# Altium PCB LedBlinker Rats Nest.PcbDoc
Units mil, origin at the board's own origin, x right, y up, seen from the top; angles counter-clockwise.
Board outline 1050 x 1050 mil, 2 copper layers (Top Layer, Bottom Layer), stack 64.8 mil thick; 27 components, 31 nets, 96 pads, 24 vias.
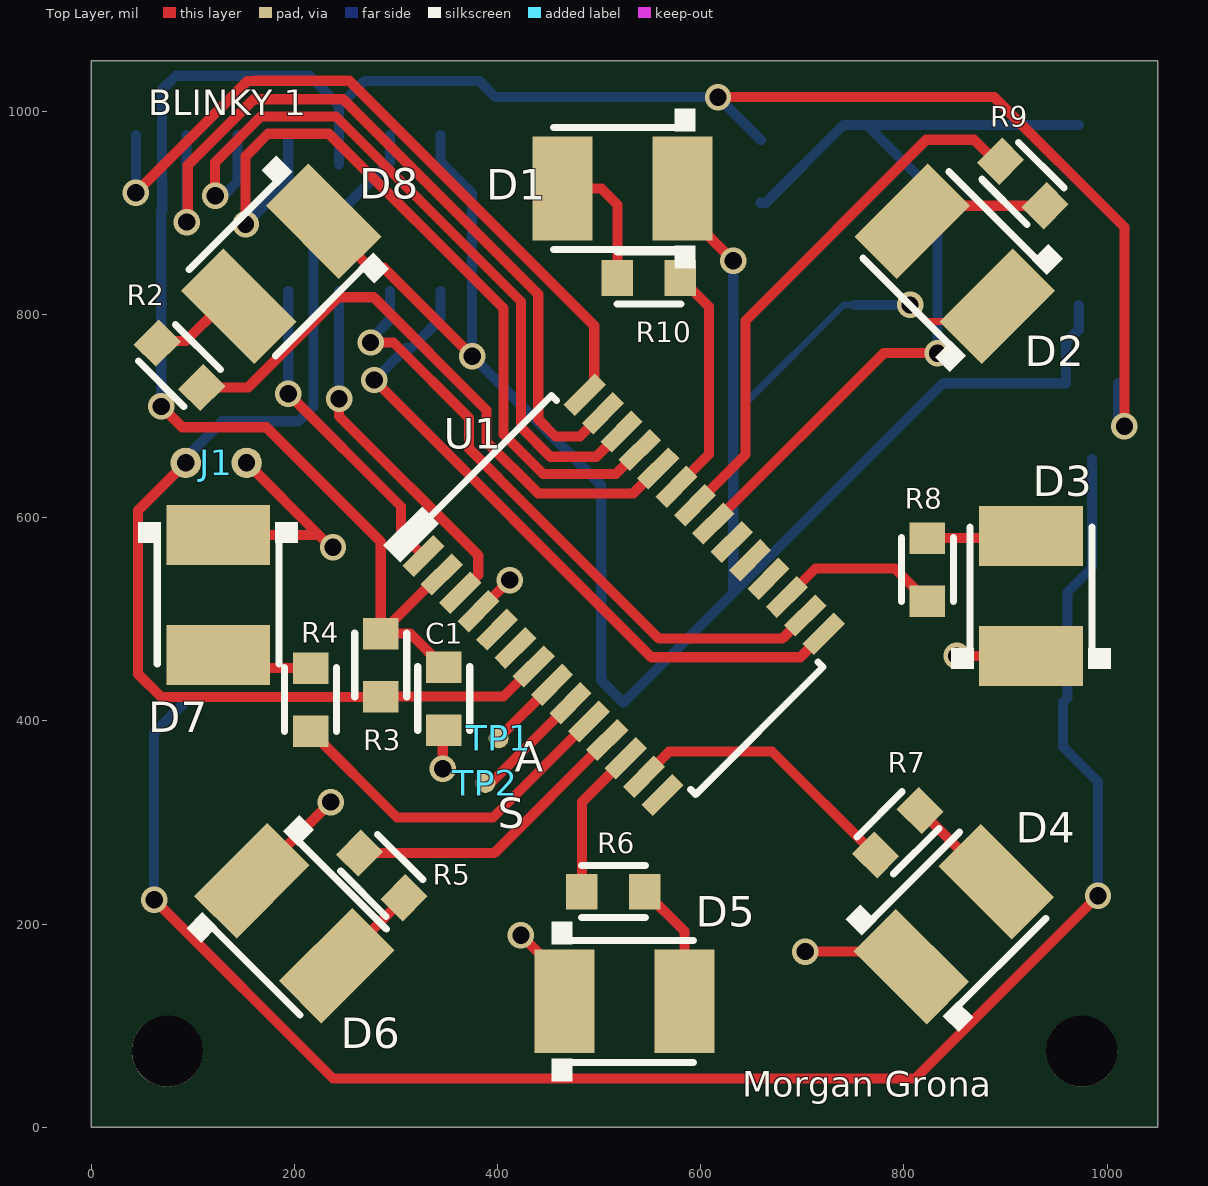
[diagram p0: Top Layer view]
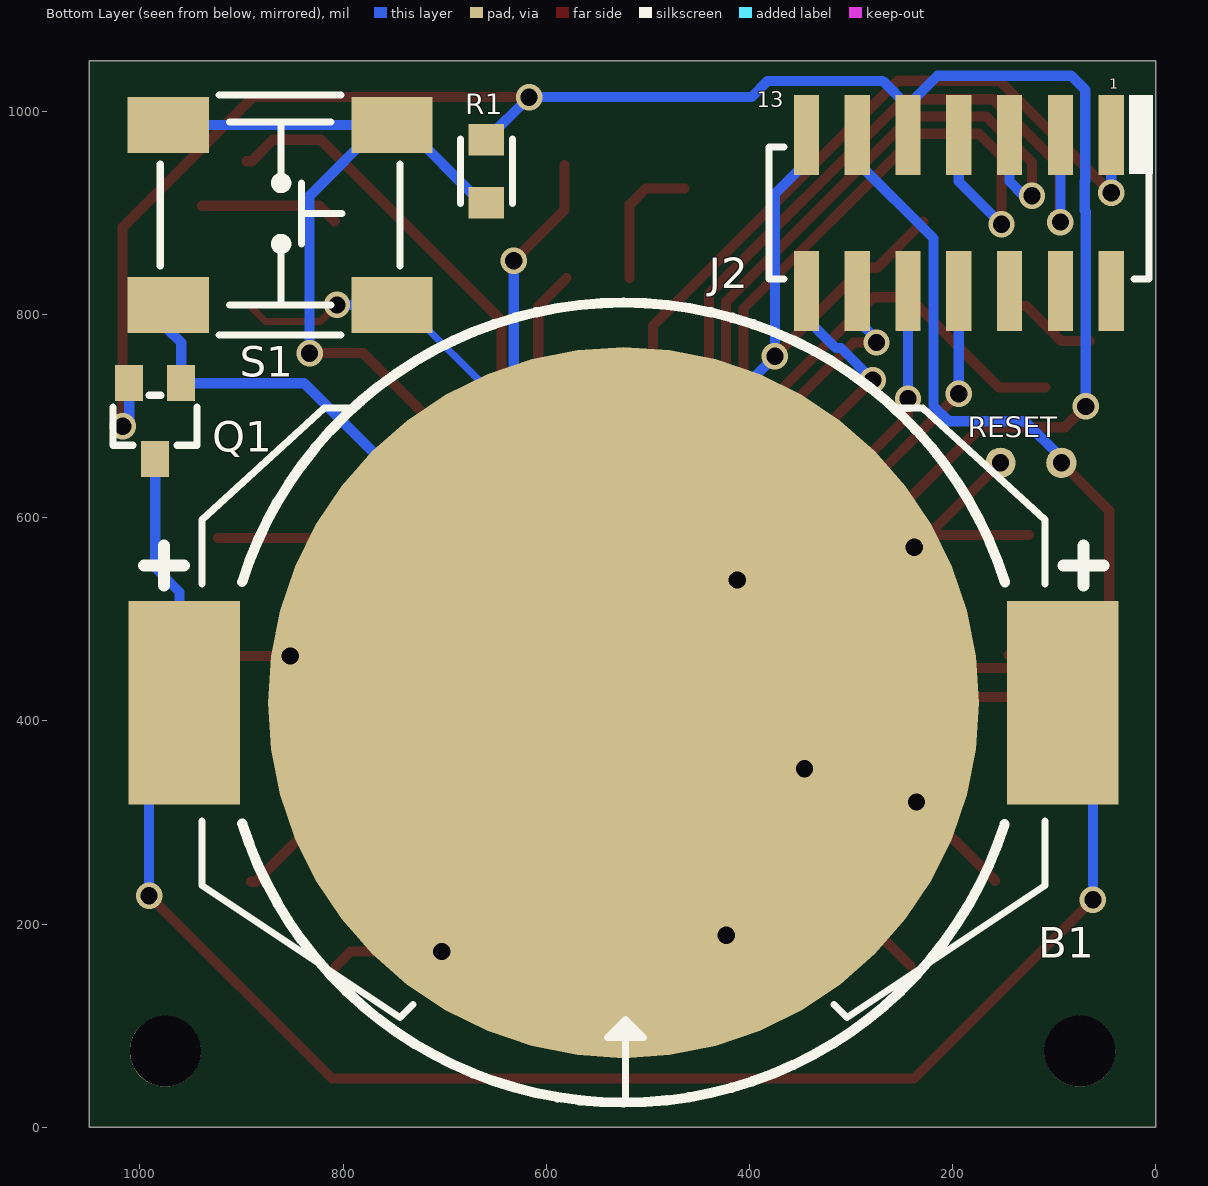
[diagram p1: Bottom Layer view, seen from below]

## Layer stack, top to bottom
Top Solder: solder mask 0.4, Solder Resist, Dk 3.5
Top Layer: signal copper 1.4
Dielectric1: core 62, FR-4, Dk 4.8
Bottom Layer: signal copper 1.4
Bottom Solder: solder mask 0.4, Solder Resist, Dk 3.5

## Board outline
0,0 0,1050 1050,1050 1050,0

## Design rules (kind name [scope] priority, off if disabled: settings)
Clearance ClearancePolygon [All vs InPoly] p1: gap=20 ignorepadtopadclearanceinfootprint=FALSE except(0: Arc-Hole Track-Hole SMDPad-Hole THPad-Hole Via-Hole Fill-Hole Poly-Hole Region-Hole Text-Hole)
Clearance [All] p2: gap=7 ignorepadtopadclearanceinfootprint=FALSE except(0: Arc-Hole Track-Hole SMDPad-Hole THPad-Hole Via-Hole Fill-Hole Poly-Hole Region-Hole Text-Hole)
HoleSize [All] p1: absolutevalues=TRUE maxlimit=250 minlimit=17 maxpercent=80.000 minpercent=20.000
MinimumSolderMaskSliver [All] p1 off: minsoldermaskwidth=10
PolygonConnect PolygonConnectVia [All vs IsVia] p1: connectstyle=Direct reliefconductorwidth=10 reliefentries=4 polygonreliefangle="90 Angle" airgapwidth=10
PolygonConnect [All] p2: connectstyle=Relief reliefconductorwidth=10 reliefentries=4 polygonreliefangle="90 Angle" airgapwidth=10
RoutingVias [All] p1: holewidth=17 width=26 viastyle="Through Hole" minholewidth=17 minwidth=26 maxholewidth=200 maxwidth=250
SilkToSilkClearance [All] p1 off: silktosilkclearance=10
SilkToSolderMaskClearance SilkscreenOverComponentPads [IsPad] p1 off: minsilkscreentomaskgap=7 clearancetoexposedcopper=TRUE
SolderMaskExpansion [All] p1: expansion=0
Width [All] p1: maxlimit=250 minlimit=7 preferedwidth=10
26 further rules are at their usual default settings.

## Components (designator, comment, footprint, x,y, rotation, side; value= is the part's Value field where it differs from the comment)
B1 "CR2032" "CONN BATTERY HOLDER CR2032" 524,418 r180 bottom locked
C1 "1uF" 0603 347,422 r270 top
D1 "GRN" "PLCC-2 AK" 523,924 r90 top
D2 "RED" "PLCC-2 AK" 850,850 r45 top
D3 "GRN" "PLCC-2 AK" 925,523 r0 top
D4 "RED" "PLCC-2 AK" 849,200 r315 top
D5 "GRN" "PLCC-2 AK" 525,124 r270 top
D6 "RED" "PLCC-2 AK" 200,201 r225 top
D7 "GRN" "PLCC-2 AK" 125,524 r180 top
D8 "RED" "PLCC-2 AK" 187,850 r135 top
J1 "RESET PADS" "JUMPER POINTS" 123,654 r180 top
J2 "JTAG/SERIAL" "CONN 14POS 7X2 SMT FEMALE SMALL" 194,900 r270 bottom locked
Q1 "DMG1013" SC-70-3 985,695 r180 bottom locked
R1 "100k" 0603 659,941 r90 bottom
R2 "390R" 0603 87,750 r135 top
R3 "100k" 0603 285,455 r90 top
R4 "390R" 0603 216,421 r90 top
R5 "390R" 0603 286,248 r315 top
R6 "390R" 0603 514,232 r0 top
R7 "390R" 0603 794,290 r45 top
R8 "390R" 0603 823,549 r90 top
R9 "390R" 0603 917,929 r315 top
R10 "390R" 0603 549,836 r180 top
S1 "TL3301" "SWITCH TACT SMT TL3301 J LEAD" 862,898 r180 bottom locked
TP1 "A" "TEST POINT SMT TINY" 401,382.9 r90 top
TP2 "S" "TEST POINT SMT TINY" 388,339 r90 top
U1 "MSP430F2122" TSSOP28 524,524 r315 top

## Footprints (in the part's own frame and the unit in brackets; to place one, negate y for a bottom-side part, rotate by r counter-clockwise, add the part's x,y. Pads: shape width x height; smd on the part's side, far side on the other; paste and mask are expansions set on the pad)
0603 [mil]
  rect 31x35 smd: 1(-31,0) 2(31,0)
  silkscreen extent -31,-26 31,26
"CONN 14POS 7X2 SMT FEMALE SMALL" [mm]
  rect 2x0.63 smd: 1(-1.95,3.81) 2(1.95,3.81) 3(-1.95,2.54) 4(1.95,2.54) 5(-1.95,1.27) 6(1.95,1.27) 7(-1.95,0) 8(1.95,0) 9(-1.95,-1.27) 10(1.95,-1.27) 11(-1.95,-2.54) 12(1.95,-2.54) 13(-1.95,-3.81) 14(1.95,-3.81)
  silkscreen extent -2.95,-4.75 1.65,4.85
"CONN BATTERY HOLDER CR2032" [mm]
  rect 2.79x5.08 smd: +(-10.985,0) +(10.985,0)
  round 17.78 smd: -(0,0)
  silkscreen extent -11.99,-10 12,10
"JUMPER POINTS" [mil]
  round 30 hole 17: 1(-30,0) 2(30,0)
"PLCC-2 AK" [mil]
  rect 102x59 smd: A(0,59) K(0,-59)
  silkscreen extent -79,-72 79,68
SC-70-3 [mm]
  rect 0.7x0.9 smd paste+0 mask+0: 1(0.65,0.95) 2(-0.65,0.95) 3(0,-0.95)
  silkscreen extent -1.05,-0.6 1.05,0.65
"SWITCH TACT SMT TL3301 J LEAD" [mil]
  rect 80x55 smd: 1(-110,-88.5) 2(110,-88.5) 3(-110,88.5) 4(110,88.5)
  silkscreen extent -118,-118 118,118
"TEST POINT SMT TINY" [mm]
  round 0.5 smd paste-100: 1(0,0)
TSSOP28 [mm]
  rect 0.4x1.1 smd: 1(-4.225,-2.85) 2(-3.575,-2.85) 3(-2.925,-2.85) 4(-2.275,-2.85) 5(-1.625,-2.85) 6(-0.975,-2.85) 7(-0.325,-2.85) 8(0.325,-2.85) 9(0.975,-2.85) 10(1.625,-2.85) 11(2.275,-2.85) 12(2.925,-2.85) 13(3.575,-2.85) 14(4.225,-2.85) 15(4.225,2.85) 16(3.575,2.85) 17(2.925,2.85) 18(2.275,2.85) 19(1.625,2.85) 20(0.975,2.85) 21(0.325,2.85) 22(-0.325,2.85) 23(-0.975,2.85) 24(-1.625,2.85) 25(-2.275,2.85) 26(-2.925,2.85) 27(-3.575,2.85) 28(-4.225,2.85)
  silkscreen extent -5.13,-3.37 4.8,2.25

## Part data
B1: library part "CONN BATTERY HOLDER CR2032", "3V Coincell Battery"
C1: library part "CAPACITOR NON-POLARIZED"
D1 D2 D3 D4 D5 D6 D7 D8: library part "LED AK"
J1: library part "CONN SIP 2"
J2: library part "CONN JTAG/SERIAL DEBUG 14POS FEMALE"
Q1: library part "TRANS PMOS 1G 2S 3D"
R1 R2 R3 R4 R5 R6 R7 R8 R9 R10: library part RESISTOR
S1: library part "SWITCH SPST TL3301 JLEAD", "SPST TACT SWITCH"
TP1 TP2: library part "TEST POINT SMT"
U1: library part "MCU MSP430F2122 TSSOP28 LED BLINKER"

## Free pads (board coordinates)
  round 70 hole 70 unplated paste-100 mask-100: ""(75,75) ""(975,75)

## Via types
v1: diameter 26, hole 17, Top Layer to Bottom Layer, 24 vias

## Nets (pads, with @x,y where several pads share a name; then routed paths per layer and width w, separated by ;. In a path a pad name is that pad's centre, name@x,y a point inside that pad or via, vN(x,y) a via of type N, cw(c..) or ccw(c..) an arc to the next point about the centre after c; other vN are vias at no path point)
GND: B1.- C1.2 D1.K D2.K D3.K D4.K D5.K D6.K D7.K D8.K J1.1 J2.13 Q1.1 S1.1 S1.2 U1.4 | length 2912.7
  Top Layer w7: v1(806,809.5) 822.5,793 876.44,793 D2.K
  Top Layer w10: D7.K 224,583 ; J1.1 224,583 ; D6.K v1(235.7,320.14) v1@236,320.14 ; D8.K 274.44,846 288,846 v1(375,759) ; v1@236,571 224,583 ; v1@237,572 v1(238,571) ; v1(346,353) 346,390 C1.2 ; U1.4 v1(412,538.67) ; v1(423,189) 466,146 D5.K ; D1.K@582,947 D1.K 582,903 v1(632,853) ; v1(702.86,173) 792.56,173 D4.K ; v1(852,464) D3.K
  Bottom Layer w7: B1.-@643.75,701.25 643.75,712.75 740.5,809.5 S1.2
  Bottom Layer w10: J2.13 344,950 375,919 v1(375,759) 502,632 502,440 B1.- B1.-@632,526 ; v1(632,853) B1.-@632,526 ; S1.2 v1(806,809.5) ; S1.1 972,785 959.41,772.41 Q1.1 838.4,732.4 B1.-@632,526
LED1: R10.1 U1.23 | length 230.3
  Top Layer w10: U1.23 608,662.29 608,808 R10.1
LED2: R9.1 U1.22 | length 535.7
  Top Layer w10: U1.22 644,662.1 644,794 822,972 869,972 890.08,950.92 R9.1
LED3: R8.1 U1.17 | length 163.1
  Top Layer w10: U1.17 712.86,550 791,550 R8.1
LED4: R7.1 U1.13 | length 280.4
  Top Layer w10: U1.13 569.05,370 670.16,370 R7.1
LED5: R6.1 U1.12 | length 149.1
  Top Layer w10: R6.1 483,320.14 U1.12
LED6: R5.1 U1.11 | length 290.1
  Top Layer w10: R5.1 396.59,269.92 U1.11
LED7: R4.1 U1.10 | length 348.2
  Top Layer w10: R4.1 301,305 395.48,305 U1.10
LED8: R2.1 U1.24 | length 594.3
  Top Layer w10: R2.1 154.18,728.08 243.1,817 278,817 389,706 389,674.92 437.92,626 438,626 440,624 533.52,624 U1.24
NetD1_A: D1.A R10.2 | length 132.6
  Top Layer w10: D1.A 502,924 518,908 R10.2
NetD2_A: D2.A R9.2 | length 137
  Top Layer w10: D2.A 823.64,907.08 R9.2
NetD3_A: D3.A R8.2 | length 100
  Top Layer w10: R8.2 D3.A@923,580
NetD4_A: D4.A R7.2 | length 103.9
  Top Layer w10: R7.2 886.12,241.72 D4.A
NetD5_A: D5.A R6.2 | length 131.2
  Top Layer w10: R6.2 584,193 D5.A D5.A@579,129
NetD6_A: D6.A R5.2 | length 94.2
  Top Layer w10: D6.A 307.92,225.48 R5.2
NetD7_A: D7.A R4.2 | length 98
  Top Layer w10: D7.A D7.A@145,465 ; D7.A@138,452 R4.2
NetD8_A: D8.A R2.2 | length 94.4
  Top Layer w10: R2.2@65.08,773.92 93.08,773.92 127.44,808.28 D8.A
NetR1_1: R1.1 S1.3 S1.4 U1.21 | length 888.1
  Top Layer w10: U1.21 780.1,762 v1(833,762)
  Bottom Layer w10: R1.1 664,910 740.5,986.5 S1.4 S1.4@763.5,986.5 ; v1(833,762) 833,917 S1.4@763.5,986.5 ; S1.3 S1.4@763.5,986.5
NetTP1_1: TP1.1 U1.8 | length 74.5
  Top Layer w10: TP1.1 U1.8
NetTP2_1: TP2.1 U1.9 | length 116.3
  Top Layer w10: TP2.1 393.29,339 U1.9
PIMO: J2.12 U1.16 | length 635.8
  Top Layer w10: v1(275.02,772.5) 297.5,772.5 372,698 372,667.88 430.88,609 430.96,609 558.96,481 680.05,481 U1.16
  Bottom Layer w10: v1@275,771 275,776 294,795 J2.12
POMI: J2.14 U1.15 | length 682.5
  Top Layer w10: v1(278.59,735.59) 551.42,462.76 698,462.76 U1.15
  Bottom Layer w10: v1(278.59,735.59) 310,767 315,767 344,796 J2.14
RST: J1.2 J2.11 R3.1 U1.7 | length 1082.4
  Top Layer w10: J1.2 46,607 46,446.53 69.03,423.5 285,423.5 R3.1 405.9,424 U1.7
  Bottom Layer w10: J1.2@94,660 129,695 204,695 219,710 219,732.36 219,875 294,950 J2.11
TCK: J2.7 U1.25 | length 790.3
  Top Layer w10: v1(152,889) 152,955.88 174.08,977.96 233.92,977.96 406,805.88 406,681.96 444.96,643 516.33,643 U1.25
  Bottom Layer w10: v1(152,889) 194,931 J2.7
TDI: J2.3 U1.27 | length 795.4
  Top Layer w10: v1@95.02,892.02 95.02,946.98 160,1011.96 248,1011.96 440,819.96 440,697 457,680 480.95,680 U1.27
  Bottom Layer w10: v1(94,891) J2.3
TDO: J2.1 U1.28 | length 723.7
  Top Layer w10: v1@45,921 154,1030 162,1030 162.04,1030.04 253.96,1030.04 495.09,788.91 495.09,732 485.72,722.63 U1.28
  Bottom Layer w10: v1(44,920) J2.1
TEST: J2.8 U1.1 | length 316.1
  Top Layer w10: v1(194,722) 305,611 305,584.32 U1.1
  Bottom Layer w10: v1(194,722) J2.8
TICK: J2.10 U1.3 | length 361.2
  Top Layer w10: v1(244,717) 244,700 381,563 381,543.86 U1.3
  Bottom Layer w10: v1(244,717) J2.10
TMS: J2.5 U1.26 | length 746.6
  Top Layer w10: v1(122,917) 122,949.92 167.04,994.96 240.96,994.96 423,812.92 423,689 452,660 497.14,660 U1.26
  Bottom Layer w10: v1(122,917) 130,917 144,931 J2.5
VBAT: B1.+ Q1.3 | length 1738.4
  Top Layer w10: v1(62,224) 238,48 811,48 v1(991,228)
  Bottom Layer w10: v1(62,224) 62,388.48 B1.+@91.52,418 ; Q1.3 985,551 961,527 961,422.52 956.48,418 956.48,374.52 991,340 v1(991,228)
VCC: C1.1 J2.9 Q1.2 R1.2 R3.2 U1.2 | length 2225.2
  Top Layer w10: v1(69,709.6) 89.6,689 172.29,689 285,576.29 R3.2 ; U1.2@343.18,544.18 R3.2 ; C1.1 314,486 R3.2 ; v1(617,1014) 889,1014 1017,886 v1(1017,690)
  Bottom Layer w10: v1(69,709.6) 69,901.36 70,902.36 70,931.36 69.6,931.76 69.6,1021.11 83.49,1035 215,1035 244,1006 J2.9@244,1005 ; J2.9@244,948 J2.9 J2.9@244,1005 ; R1.2 v1(617,1014) 398,1014 382,1030 269,1030 J2.9@244,1005 ; Q1.2 1010.59,696.41 v1(1017,690)
pads on no net: J2.2 J2.4 J2.6 U1.5 U1.6 U1.14 U1.18 U1.19 U1.20

## Silkscreen, mask and mechanical layers (free items; w line width, h text height)
Top Overlay:
  text "BLINKY 1" at 56,996 h25
  text "A" at 417,350 h30
  text "S" at 400,294.18 h30
  text "Morgan Grona" at 641,30 h25
Bottom Overlay:
  text "13" at 393,1004 h15
  text "RESET" at 185,679 h20
Mechanical 1:
  the board outline again, w7
Mechanical 5:
  region: 343,596 326.74,612.26 288.55,574.08 304.82,557.82
  region: 845.46,741.4 859.61,755.54 841.93,773.22 827.79,759.08
  region: 944.46,840.39 958.6,854.54 940.92,872.21 926.78,858.07
  region: 308.6,845.46 294.46,859.61 276.78,841.93 290.92,827.79
  region: 209.61,944.46 195.46,958.6 177.79,940.92 191.93,926.78
  region: 205,599 185,599 185,574 205,574
  region: 65,599 45,599 45,574 65,574
  rectangle: 985,451 1005,476
  rectangle: 845,451 865,476
  region: 105.54,210.61 91.4,196.46 109.08,178.79 123.22,192.93
  region: 204.54,309.6 190.39,295.46 208.07,277.78 222.21,291.92
  region: 451,205 451,185 476,185 476,205
  region: 451,65 451,45 476,45 476,65
  region: 840.39,105.54 854.54,91.4 872.21,109.08 858.07,123.22
  region: 741.4,204.54 755.54,190.39 773.22,208.07 759.08,222.21
  region: 599,843 599,863 574,863 574,843
  region: 599,983 599,1003 574,1003 574,983
  lines w7: 329.02,594.42 453.47,718.87 ; 454.02,718.42 458.97,713.47 ; 590.65,334.21 596.31,328.55 720.76,453 715.1,458.66 ; 65,439 185,439 185,454 185,609 65,609 65,439 ; 96.47,217.68 107.08,207.07 216.68,97.47 301.53,182.32 181.32,302.53 96.47,217.68 ; 96.47,831.32 181.32,746.47 191.93,757.08 301.53,866.68 216.68,951.53 96.47,831.32 ; 439,65 439,185 609,185 609,65 454,65 439,65 ; 442,863 442,983 612,983 612,863 457,863 442,863 ; 746.47,181.32 831.32,96.47 841.93,107.08 951.53,216.68 866.68,301.53 746.47,181.32 ; 746.47,868.68 757.08,858.07 866.68,748.47 951.53,833.32 831.32,953.53 746.47,868.68 ; 865,439 985,439 985,454 985,609 865,609 865,439
Mechanical 6:
  rectangle: 2,936 32,1016
  lines w5: 797,900 841,900 ; 841,866 841,934 ; 6,786 380,786 380,1014 6,1014 6,786 ; 744,780 744,1016 980,1016 980,780 744,780
  lines w7: 7,835 21,835 ; 109,305 109,239.33 303.6,109.6 322.5,128.5 ; 109,540 109,600.42 228.55,710 296,710 ; 365,835 379,835 ; 365,965 379,965 ; 508,99 538,99 533,104 513,104 ; 523,35.67 523,114 ; 727,126 744,109 939,239 939,310 ; 756,710 819.27,710 939,600.25 939,540 ; 523,114 543,94 503,94 523,114

## Dimensions
1050,1050 to 1050,0 on Mechanical 5
0,1050 to 1050,1050 on Mechanical 5

## Text inside footprints (layer, text, board x,y; h text height)
J2: Bottom Overlay "1" at 46,1022 h10